# EAGLE board RotaryEncoderModule_r2_0_1 (EAGLE 9.6.2)
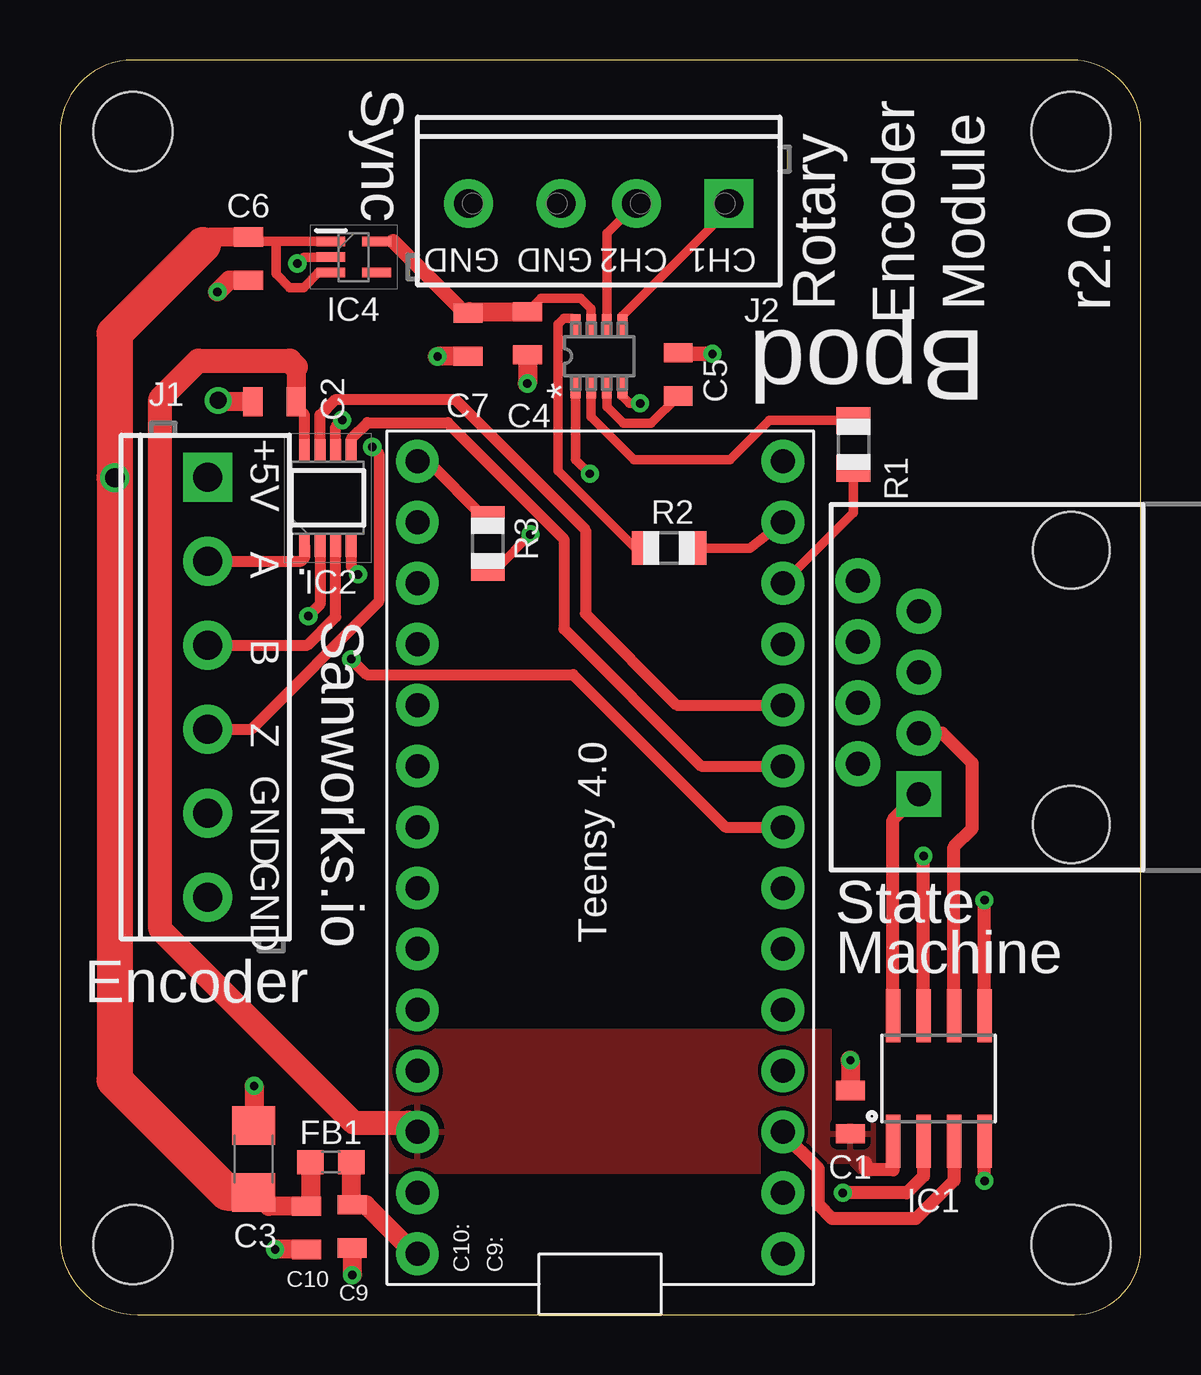
[diagram p0: board, top side]
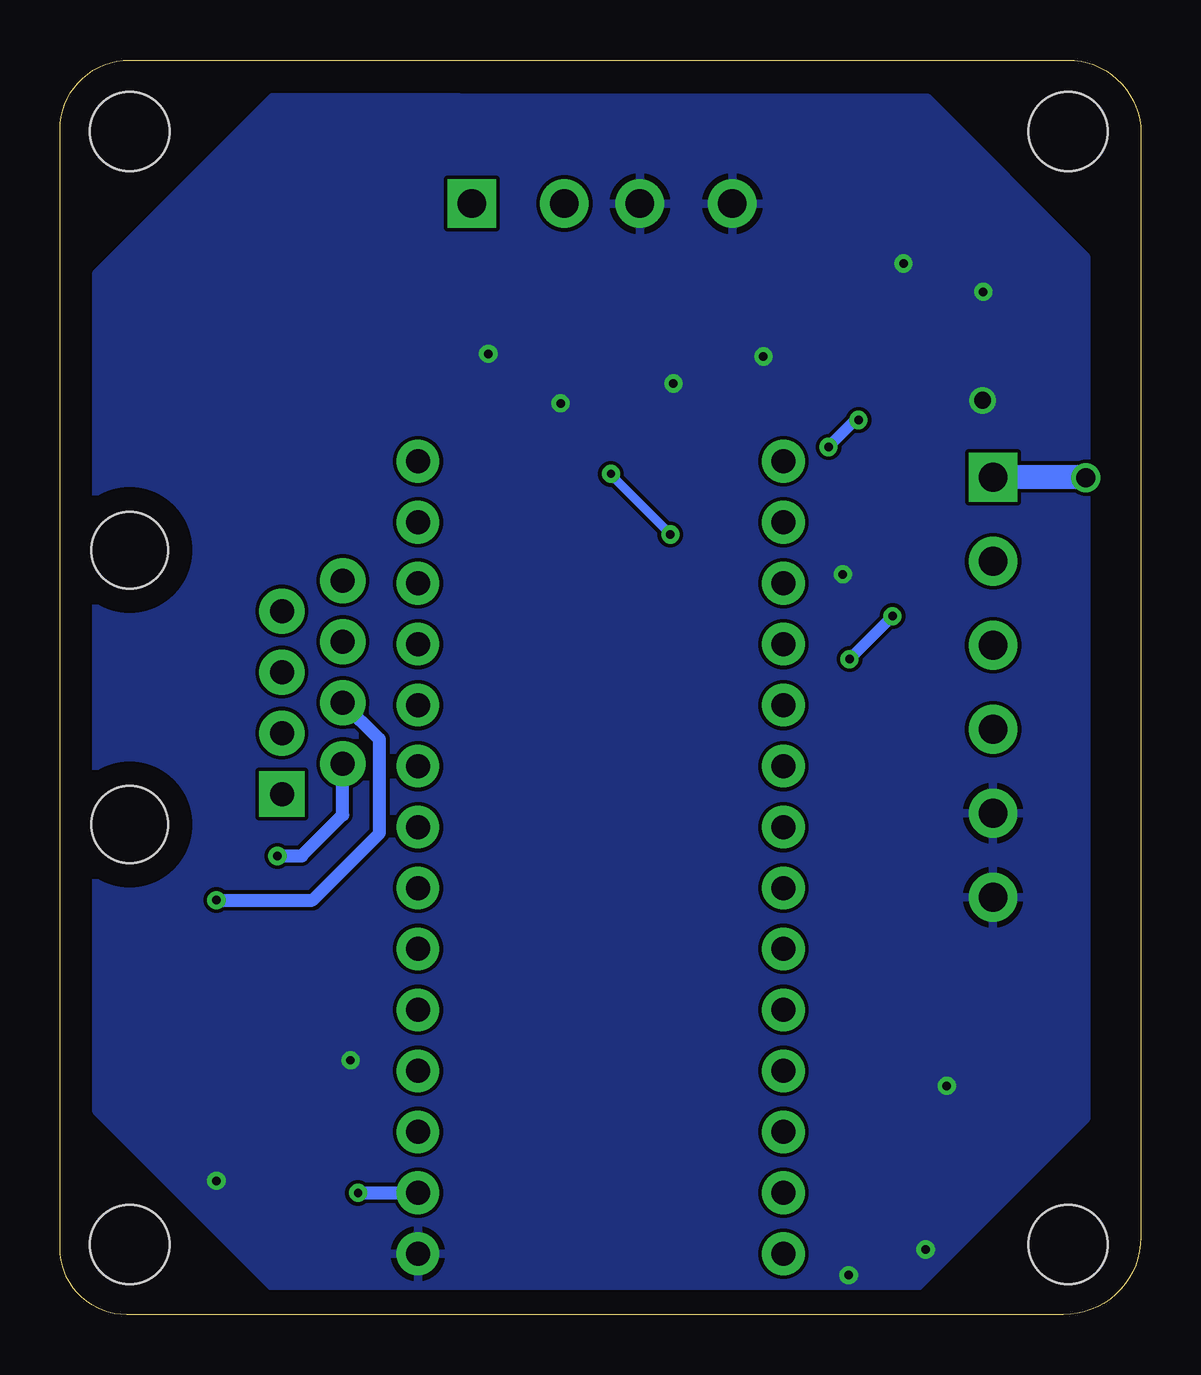
[diagram p1: board, bottom side, seen from below]

Size 45.05 x 52.28 mm. Coordinates in mm from the lower left corner, seen from the top.
Outline: 0,49.23 0,3.23 arc90 3.23,0 42.27,0 arc90 45.05,2.78 45.05,49.38 arc90 42.16,52.28 3.05,52.28 arc90 0,49.23
Copper layers (1*16): Top 0.035mm / dielectric 1.5mm / Bottom 0.035mm
Design rules "default *": minimum track width 6mil, minimum drill 0.35mm, track to track 6mil, track to pad 6mil, pad to pad 6mil, via to via 6mil, smd to smd 6mil, copper to edge 40mil, drill to drill 6mil, minimum pad ring 10mil, minimum via ring 8mil, stop-mask expansion 4mil, vias tented up to drill 0mil, thermal gap 10mil
tRestrict: area 32.1,5.8 to 33.3,6.2; area 29.3,5.8 to 29.4,7

## Footprints (pad centres in the part's own frame; a part is rotated, then mirrored left to right if it is on the bottom)
0805 = smd 0.8 x 1.2: 1 -0.9,0; 2 0.9,0
1206@2 = smd 1.6 x 1.8: 1 -1.4,0; 2 1.4,0
0603 = smd 1.1 x 1: 1 -0.85,0; 2 0.85,0
SO08 = smd 0.61 x 2.21: 1 -1.905,-2.616; 2 -0.635,-2.616; 3 0.635,-2.616; 4 1.905,-2.616; 5 1.905,2.616; 6 0.635,2.616; 7 -0.635,2.616; 8 -1.905,2.616
SOP65P400X110-8N = smd 0.95 x 0.45: 1 -1.975,0.975; 2 -1.975,0.325; 3 -1.975,-0.325; 4 -1.975,-0.975; 5 1.975,-0.975; 6 1.975,-0.325; 7 1.975,0.325; 8 1.975,0.975
TSOT-23-8_1P625X2P9_ADI = smd 0.94 x 0.406: 1 -1.283,0.975; 2 -1.283,0.325; 3 -1.283,-0.325; 4 -1.283,-0.975; 5 1.283,-0.975; 6 1.283,-0.325; 7 1.283,0.325; 8 1.283,0.975
SOT65P210X110-5N = smd 1.2 x 0.4: 1 -0.95,0.65; 2 -0.95,0; 3 -0.95,-0.65; 4 0.95,-0.65; 5 0.95,0.65
SCREWTERMINAL-3.5MM-6 = drill 1.2 pad 2.032 square: 1 0,0 | drill 1.2 pad 2.032: 2 3.5,0; 3 7,0; 4 10.5,0; 5 14,0; 6 17.5,0
SCREWTERMINAL-3.5MM-4_LOCK = drill 1.2 pad 2.032 square: 1 -0.178,0 | drill 1.2 pad 2.032: 2 3.678,0; 3 6.822,0; 4 10.678,0
TEENSY4.0_SIMPLE_NO_VUSB = drill 1 pad 1.778: 3.3V@1 7.62,10.16; AGND 7.62,12.7; D0 -7.62,12.7; D1 -7.62,10.16; D2 -7.62,7.62; D3 -7.62,5.08; D4 -7.62,2.54; D5 -7.62,0; D6 -7.62,-2.54; D7 -7.62,-5.08; D8 -7.62,-7.62; D9 -7.62,-10.16; D10 -7.62,-12.7; D11 -7.62,-15.24; D12 -7.62,-17.78; D13/LED 7.62,-17.78; D14/A0 7.62,-15.24; D15/A1 7.62,-12.7; D16/A2 7.62,-10.16; D17/A3 7.62,-7.62; D18/A4 7.62,-5.08; D19/A5 7.62,-2.54; D20/A6 7.62,0; D21/A7 7.62,2.54; D22/A8 7.62,5.08; D23/A9 7.62,7.62; GND@1 -7.62,15.24; VIN 7.62,15.24
R0805 = smd 1.1 x 1.4: 1 -1,0; 2 1,0
STAND-OFF = hole 3.302: 0,0
RJ45-8 = drill 1 pad 1.88 square: 1 -4.445,6.35 | drill 1 pad 1.88: 2 -3.175,8.89; 3 -1.905,6.35; 4 -0.635,8.89; 5 0.635,6.35; 6 1.905,8.89; 7 3.175,6.35; 8 4.445,8.89 | hole 3.2: -5.715,0; 5.715,0

## Placement (x,y rotation side)
C1  0.1uF  [0805]  32.95,8.45 90 top
C2  0.1uF  [0805]  8.94,38.04 180 top
C3  4.7uf  [1206@2]  8.07,6.49 270 top
C4  0.1uF  [0805]  19.48,40.89 90 top
C5  0.1uF  [0805]  25.77,39.18 90 top
C6  1uf  [0805]  7.86,44.01 270 top
C7  1uf  [0805]  17.01,40.83 270 top
C9  0.01uf  [0805]  12.18,3.68 270 top
C10  0.1uf  [0805]  10.28,3.62 270 top
FB1  30Ω/1.8A  [0603]  11.29,6.35 0 top
IC1  SN65HVD31DR  [SO08]  36.63,9.84 0 top
IC2  74LVC3G17DP,125  [SOP65P400X110-8N]  11.17,34.04 90 top
IC3  LTC2632AHTS8-LI12TRMPBF  [TSOT-23-8_1P625X2P9_ADI]  22.47,39.94 90 top
IC4  MAX8511EXK33+T  [SOT65P210X110-5N]  12.25,44.07 0 top
J1  [SCREWTERMINAL-3.5MM-6]  6.16,34.9 270 top
J2  [SCREWTERMINAL-3.5MM-4_LOCK]  27.71,46.3 180 top
MC1  TEENSY4.0_SIMPLE_NO_VUSB  [TEENSY4.0_SIMPLE_NO_VUSB]  22.52,17.78 180 top
R1  22  [R0805]  33.07,36.26 270 top
R2  22  [R0805]  25.39,31.94 0 top
R3  22  [R0805]  17.83,32.13 270 top
U$1  [STAND-OFF]  42.15,2.92 0 top
U$2  RJ45-8PTH  [RJ45-8]  42.15,26.14 90 top
U$3  [STAND-OFF]  3.04,49.31 0 top
U$4  [STAND-OFF]  42.15,49.31 0 top
U$5  [STAND-OFF]  3.04,2.92 0 top

## Library data of the parts
C1 C2 C4-C7 = SparkFun-Capacitors; PROD_ID: CAP-08064
C3 = SparkFun-Capacitors
C9 C10 = SparkFun-Capacitors; PROD_ID: CAP-11330
FB1 = SparkFun-Coils; PROD_ID: NDUC-13805
IC1 = Joshparts4
IC2 = SamacSys_Parts; DESCRIPTION: 74LVC3G17 - Triple non-inverting Schmitt trigger with 5 V tolerant input@en-us; HEIGHT: 1.1mm; MANUFACTURER_NAME: Nexperia; MANUFACTURER_PART_NUMBER: 74LVC3G17DP,125; MOUSER_PART_NUMBER: 771-LVC3G17DP125; MOUSER_PRICE-STOCK: https://www.mouser.co.uk/ProductDetail/Nexperia/74LVC3G17DP125?qs=me8TqzrmIYUUngWcw0uHGA%3D%3D
IC3 = LTC2632; COPYRIGHT: Copyright (C) 2022 Ultra Librarian. All rights reserved.; MANUFACTURER_PART_NUMBER: LTC2632AHTS8-LI12#TRMPBF; MFR_NAME: Analog Devices Inc
IC4 = SamacSys_Parts; DESCRIPTION: LDO Voltage Regulators 120mA Linear Regulator; HEIGHT: 1.1mm; MANUFACTURER_NAME: Maxim Integrated; MANUFACTURER_PART_NUMBER: MAX8511EXK33+T; MOUSER_PART_NUMBER: 700-MAX8511EXK33T; MOUSER_PRICE-STOCK: https://www.mouser.co.uk/ProductDetail/Maxim-Integrated/MAX8511EXK33%2bT?qs=Jw2w9zrI6w%252Bak9NGDajN9A%3D%3D
J1 J2 = SparkFun-Connectors
MC1 = Teensy4.0_SIMPLE_N_VUSB
R1-R3 = adafruit
U$1-U$5 = SparkFun

## Nets
3V3: C1.1 C2.1 IC1.1 IC2.8 MC1.3.3V@1
3V3A: C4.2 C7.1 IC3.7 IC4.5
5V: C3.2 C6.1 C10.1 FB1.1 IC4.1 IC4.3 J1.1
CS: IC3.2 R1.1
D6: IC2.2 MC1.D6
D7: IC2.5 MC1.D7
D8: IC2.7 MC1.D8
GND: C1.2 C2.2 C3.1 C4.1 C5.2 C6.2 C7.2 C9.2 C10.2 IC1.4 IC2.4 IC3.4 IC4.2 J1.5 J1.6 J2.3 J2.4 MC1.GND@1
MOSI: IC3.8 R2.1
N$1: IC1.6 U$2.3
N$2: IC2.1 J1.2
N$3: IC1.8 U$2.1
N$4: IC1.5 U$2.4
N$5: IC1.7 U$2.2
N$6: IC2.3 J1.3
N$7: IC2.6 J1.4
N$8: IC3.5 J2.1
N$9: IC3.6 J2.2
N$10: C5.1 IC3.3
N$11: MC1.D10 R1.2
N$12: MC1.D11 R2.2
N$13: MC1.D13/LED R3.1
N$14: C9.1 FB1.2 MC1.VIN
RX1: IC1.2 MC1.D0
SCK: IC3.1 R3.2
TX1: IC1.3 MC1.D1

## Tracks (layer width: path | path; a pad name or v marks a point on that pad's centre or on a via)
3V3
  Top 0.45: IC2.8 10.19,37.5 9.84,37.85 C2.1
  Top 0.55: 32.95,7.49 C1.1 | IC1.1 34.72,6.03 33.58,6.03 33.58,6.35
  Top 0.8: 9.83,39.5 9.84,39.49 C2.1
  Top 1: MC1.3.3V@1 14.52,8 12.25,8 4.18,16.07 4.18,38.16 5.77,39.75 9.58,39.75 9.83,39.5
  pour Top: 32.12,7.94 32.12,11.87 13.77,11.87 13.77,5.91 33.96,5.91 33.96,7.94
3V3A
  Top 0.4: 16.88,41.73 C7.1 17.07,41.79 | IC4.5 13.89,44.72 | IC3.7 22.14,41.92 21.71,42.35 20.04,42.35 C4.2
  Top 0.6: 16.88,41.73 13.89,44.72
  Top 0.8: 17.07,41.79 C4.2
5V  (via drill 0.8)
  Top 0.4: IC4.1 9.01,44.72 | 9.01,44.72 8.05,44.72 C6.1 | IC4.3 10.77,43.42 10.15,42.8 9.58,42.8 9.01,43.37 9.01,44.72
  Top 0.8: FB1.1 10.44,4.69 C10.1 8.71,4.52 8.14,5.09 C3.2 | 5.96,44.58 6.29,44.91 C6.1
  Top 1.5: v2.29,34.87 2.28,34.89 | 2.28,34.89 2.28,9.78 6.96,5.09 C3.2 | 5.96,44.58 2.28,40.89 2.28,34.89
  Bottom 1: v2.29,34.87 2.29,34.91 6.15,34.91 J1.1
CS
  Top 0.4: IC3.2 22.14,37.41 23.93,35.62 27.93,35.62 29.58,37.27 33.06,37.27 R1.1
D6  (via drill 0.35)
  Top 0.45: IC2.2 10.84,29.6 v10.35,29.11 | v12.14,27.32 12.79,26.67 21.39,26.67 27.74,20.32 MC1.D6
  Bottom 0.45: v10.35,29.11 v12.14,27.32
D7
  Top 0.45: MC1.D7 26.72,22.86 21.01,28.57 21.01,32.32 16.16,37.17 12.82,37.17 12.14,36.5 IC2.5
D8
  Top 0.45: MC1.D8 25.71,25.4 21.9,29.21 21.9,32.7 16.46,38.14 11.5,38.14 10.84,37.48 IC2.7
GND  (via drill 0.35, 0.7)
  Top 0.4: IC3.4 23.44,38.27 23.74,37.97 v24.18,37.97 | v9.9,43.8 10.17,44.07 IC4.2
  Top 0.45: IC2.4 12.14,31.18 12.42,30.9 v12.42,30.85
  Top 0.55: v38.53,5.58 IC1.4
  Top 0.6: C5.2 25.81,40.04 v27.2,40.04
  Top 0.8: v32.95,10.6 C1.2 | C2.2 6.66,38.04 v6.59,38.1 | C4.1 v19.48,38.8 | C6.2 7.05,43.1 v6.57,42.62 | C7.2 v15.74,39.93 | C9.2 v12.18,1.65 | C10.2 v8.97,2.72 | v8.09,9.54 8.09,7.92 C3.1
  pour Bottom: 9.32,1.14 36.19,1.14 43.55,8.51 43.55,43.38 36.17,50.74 20.56,50.7 8.91,50.7 2.28,44.07 2.28,8.19
MOSI
  Top 0.4: R2.1 23.98,31.94 20.75,35.17 20.75,41.27 21.01,41.53 21.34,41.53 21.49,41.38 IC3.8
N$1
  Top 0.55: IC1.6 37.27,19.49 38.03,20.26 38.03,22.99 36.78,24.23 U$2.3
N$2
  Top 0.45: IC2.1 10.19,31.53 10.05,31.4 J1.2
N$3
  Top 0.55: U$2.1 34.72,20.62 IC1.8
N$4  (via drill 0.35)
  Top 0.55: IC1.5 v38.53,17.27
  Bottom 0.55: v38.53,17.27 34.53,17.27 31.74,20.07 31.74,23.98 U$2.4
N$5  (via drill 0.35)
  Top 0.55: IC1.7 v36,19.11
  Bottom 0.55: v36,19.11 34.98,19.11 33.26,20.83 U$2.2
N$6
  Top 0.45: J1.3 10.31,27.9 11.49,29.08 IC2.3
N$7  (via drill 0.35)
  Top 0.45: J1.4 7.98,24.4 13.3,29.72 13.3,35.88 v13.02,36.16 | IC2.6 11.49,36.99 11.77,37.27 v11.77,37.28
  Bottom 0.45: v13.02,36.16 11.9,37.28 v11.77,37.28
N$8
  Top 0.4: IC3.5 23.44,41.62 27.89,46.06 J2.1
N$9
  Top 0.4: J2.2 22.79,45.06 IC3.6
N$10
  Top 0.4: IC3.3 22.79,37.84 23.5,37.14 24.63,37.14 C5.1
N$11
  Top 0.4: MC1.D10 33.07,33.42 R1.2
N$12
  Top 0.4: MC1.D11 28.75,31.94 R2.2
N$13
  Top 0.45: R3.1 17.76,33.2 17.71,33.2 15.34,35.56 MC1.D13/LED
N$14
  Top 0.8: MC1.VIN 14.6,2.73 12.74,4.58 C9.1 12.14,4.62 FB1.2
RX1  (via drill 0.35)
  Top 0.55: IC1.2 36,5.78 35.3,5.08 v32.63,5.08
  Bottom 0.55: v32.63,5.08 MC1.D0
SCK  (via drill 0.35)
  Top 0.4: v22.09,35.04 21.49,35.63 IC3.1 | v19.61,32.51 18.23,31.13 R3.2
  Bottom 0.4: v22.09,35.04 22.09,34.99 v19.61,32.51
TX1
  Top 0.55: IC1.3 37.27,5.59 35.68,4 32.19,4 31.61,4.57 31.61,6.1 30.14,7.57 MC1.D1

## Text on the board
tPlace: Sync | Encoder | GND | GND | CH2 | CH1 | Rotary | Module | r2.0 | Bpod | +5V | A | . | Sanworks.io | B | Z | GND | GND | State | Teensy 4.0 | Machine | Encoder | C10: | C9: